# Altium PCB pcb_v3.PcbDoc
Units mil, origin at the board's own origin, x right, y up, seen from the top; angles counter-clockwise.
Board outline 5340 x 3220 mil, 2 copper layers (Top Layer, Bottom Layer); 27 components, 41 nets, 205 pads, 0 vias.
Unrouted connection lines stored in the file: 1.
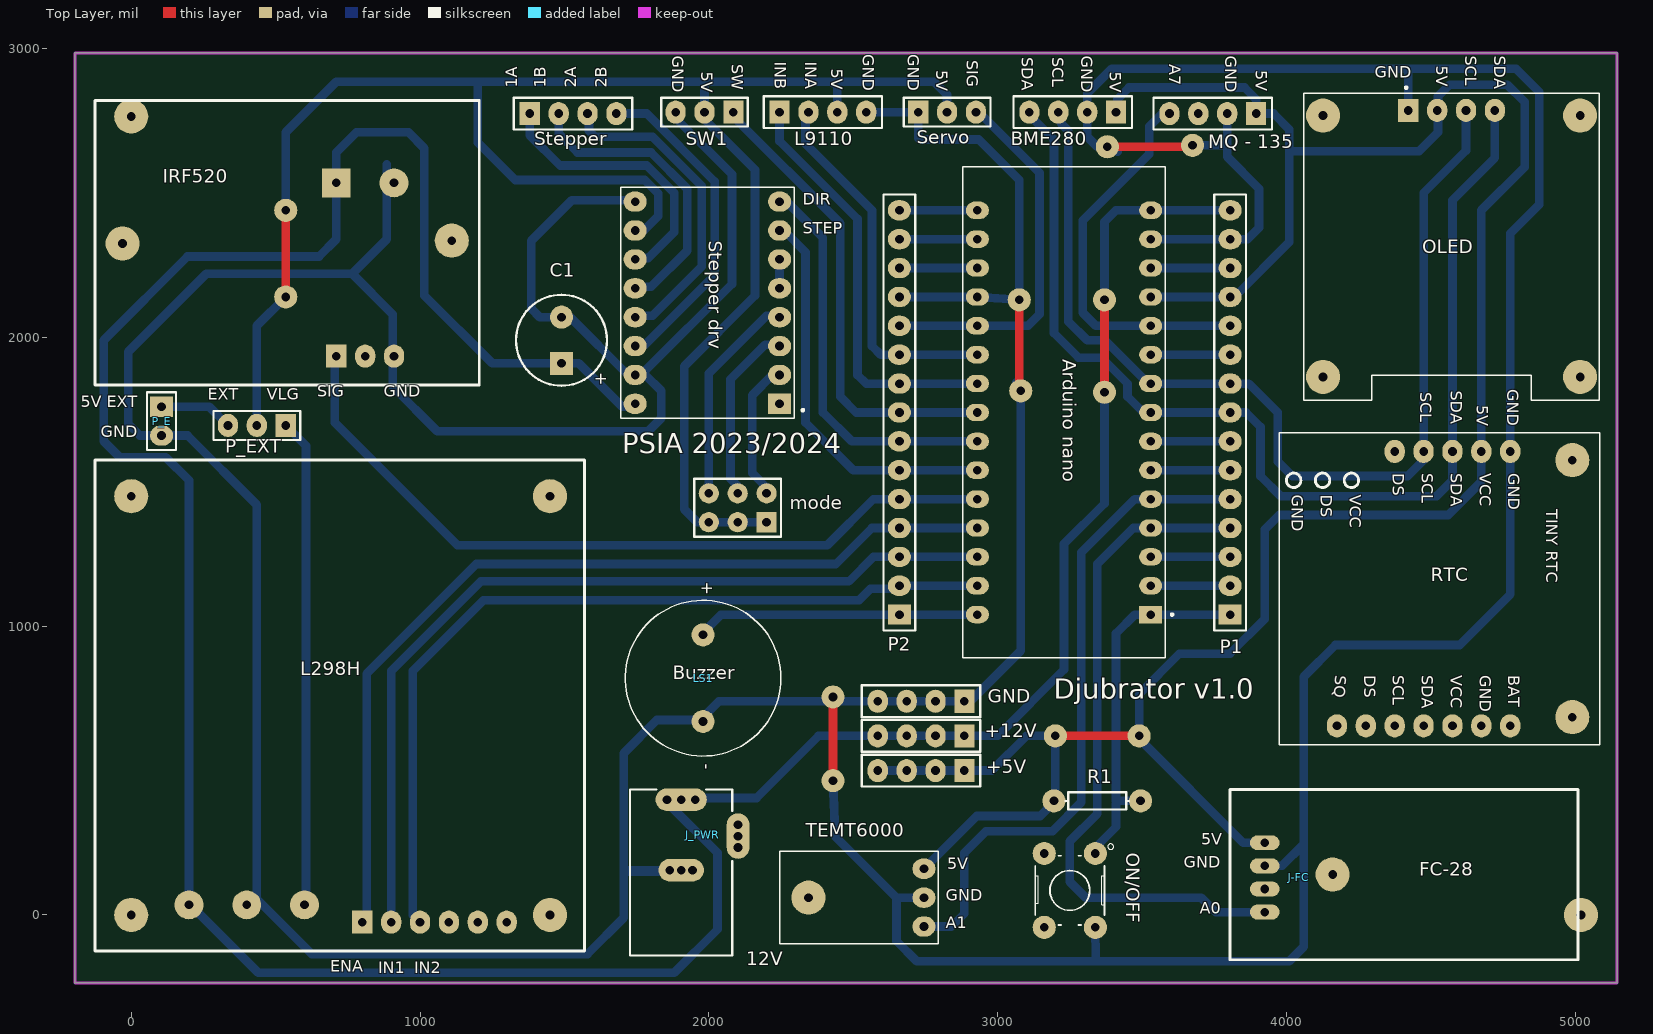
[diagram p0: Top Layer view]
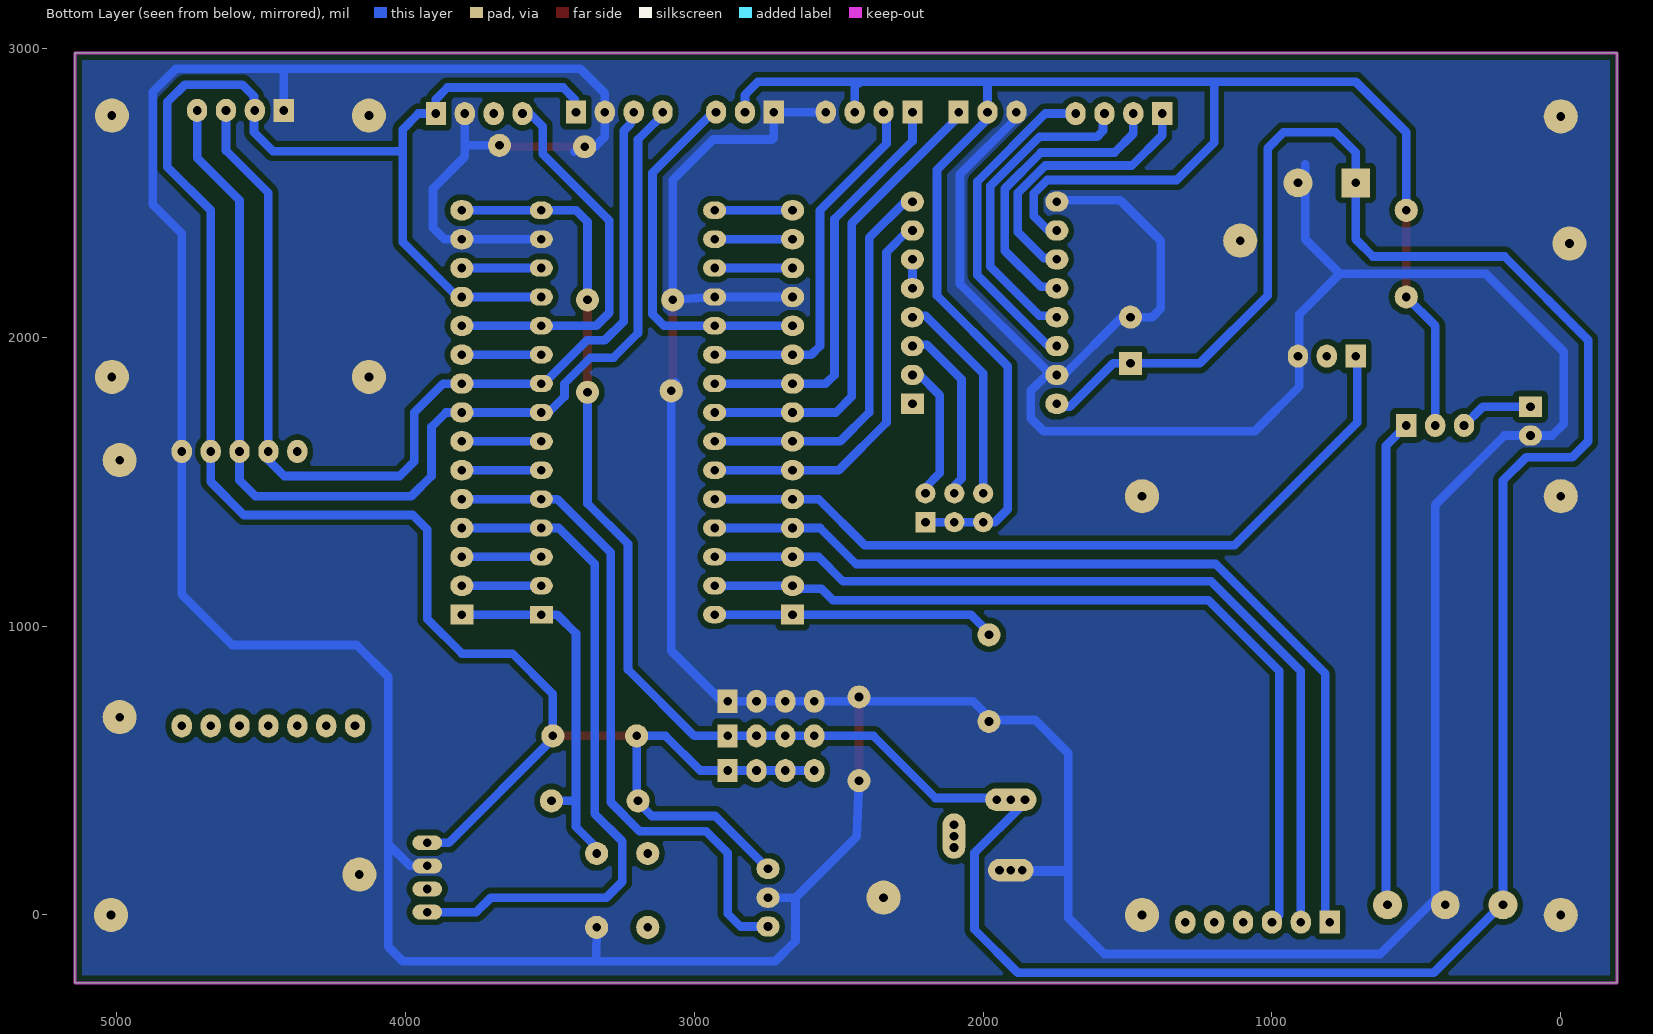
[diagram p1: Bottom Layer view, seen from below]

## Layer stack, top to bottom
Top Solder: solder mask 0.4, Solder Resist, Dk 3.5
Top Layer: signal copper 1.4
Dielectric 1: dielectric 12.6, FR-4, Dk 4.8
Bottom Layer: signal copper 1.4
Bottom Solder: solder mask 0.4, Solder Resist, Dk 3.5

## Board outline
-195,-235 -195,2985 5145,2985 5145,-235

## Design rules (kind name [scope] priority, off if disabled: settings)
Clearance [All] p1: gap=10 ignorepadtopadclearanceinfootprint=FALSE except(0: Arc-Hole Track-Hole SMDPad-Hole THPad-Hole Via-Hole Fill-Hole Poly-Hole Region-Hole Text-Hole; 20: Arc-Poly Track-Poly SMDPad-Poly THPad-Poly Via-Poly Fill-Poly Poly-Poly)
Height [All] p1: minheight=0 maxheight=2000 prefheight=500
PlaneClearance [All] p1: clearance=60
PlaneConnect [All] p1: planeconnectstyle=Direct reliefexpansion=20 reliefentries=4 reliefconductorwidth=10 reliefairgap=10
PolygonConnect [All] p1: connectstyle=Direct reliefconductorwidth=10 reliefentries=4 polygonreliefangle="90 Angle" airgapwidth=10
RoutingVias [All] p1: holewidth=28 width=50 viastyle="Through Hole" minholewidth=28 minwidth=50 maxholewidth=28 maxwidth=50
SolderMaskExpansion [All] p1: expansion=4
Width [All] p1: maxlimit=30 minlimit=20 preferedwidth=30 minimp=50.000000 maximp=50.000000 favimp=50.000000
27 further rules are at their usual default settings.

## Components (designator, comment, footprint, x,y, rotation, side; value= is the part's Value field where it differs from the comment)
+5V "Header 4" HDR1X4 2885,500 r180 top
+12V "Header 4" HDR1X4 2885,620 r180 top
"Arduino nano" "Arduino nano" "arduino nano" 3230,1735 r90 top
BME280 "BME280" HDR1X4 3410,2780 r180 top
C1 "Cap Pol1" ELCO-160 1490,1990 r270 top value=100uF
GND "Header 4" HDR1X4 2885,740 r180 top
IRF520 "IRF520" irf520 -85,1835 r0 top
J-FC "FC-28" FC-28 3885,240 r270 top
J_PWR "12V" KLD-0202 1904.37,-140.28 r90 top
L298H "L298H" L298N 725,725 r270 top
L9110 "L9110" HDR1X4 2245,2780 r0 top
LS1 "Buzzer" BUZZER 1980,820 r270 top
mode "Header 3X2" HDR2X3 2200,1360 r180 top
"MQ - 135" "MQ - 135" HDR1X4 3895,2775 r180 top
OLED "OLED" OLED 4571.93,2333.07 r0 top
ON/OFF "SW-PB" SW_B3F-1000 3250,85 r270 top
P1 "Header 15" HDR1X15 3805,1040 r90 top
P2 "Header 15" HDR1X15 2660,1040 r90 top
P_E "Header 2" HDR1x2 105,1760 r270 top
P_EXT "Header 3" HDR1x3 535,1695 r180 top
R1 "Res1" AXIAL-0.3 3345,395 r180 top value=10K
RTC "DS1307 RTC" RTC 4480,1125 r270 top
Servo "Servo" HDR1x3 2725,2780 r0 top
Stepper "Header 4" HDR1X4 1380,2775 r0 top
"Stepper drv" "A4988" A4988 1995,2120 r180 top
SW1 "Header 3" HDR1x3 2085,2780 r180 top
TEMT6000 "TEMT6000" temt6000 2745,-40 r90 top

## Footprints (in the part's own frame and the unit in brackets; to place one, negate y for a bottom-side part, rotate by r counter-clockwise, add the part's x,y. Pads: shape width x height; smd on the part's side, far side on the other; paste and mask are expansions set on the pad)
A4988 [mil]
  rect 80x70 hole 30: 1(-250,350)
  oval 80x70 hole 30: 2(-250,250) 3(-250,150) 4(-250,50) 5(-250,-50) 6(-250,-150) 7(-250,-250) 8(-250,-350) 9(250,-350) 10(250,-250) 11(250,-150) 12(250,-50) 13(250,50) 14(250,150) 15(250,250) 16(250,350)
  silkscreen extent -335,-400 300,400, body extent -294,-400 294,400, height 224
"arduino nano" [mil]
  rect 60x80 / inner oval 60x80 / far side rect 60x80 hole 30: 1(-695,-300)
  oval 60x80 hole 30: 2(-595,-300) 3(-495,-300) 4(-395,-300) 5(-295,-300) 6(-195,-300) 7(-95,-300) 8(5,-300) 9(105,-300) 10(205,-300) 11(305,-300) 12(405,-300) 13(505,-300) 14(605,-300) 15(705,-300) 16(705,300) 17(605,300) 18(505,300) 19(405,300) 20(305,300) 21(205,300) 22(105,300) 23(5,300) 24(-95,300) 25(-195,300) 26(-295,300) 27(-395,300) 28(-495,300) 29(-595,300) 30(-695,300)
  silkscreen extent -845,-378 855,350, body extent -880,-355 865,345, height 236
AXIAL-0.3 [mil] "Axial Device, Thru-Hole; 2 Leads; 0.3 in Pin Spacing"
  round 80 hole 30: 1(-150,0) 2(150,0)
  silkscreen extent -109,-30 109,30, body extent -165,-49 165,45, height 122
BUZZER [mil]
  round 80 hole 30: N(150,0) P(-150,0)
  silkscreen extent -270,-270 270,270, body extent -276,-271 276,281, height 276
ELCO-160 [mil] "Polarized Capacitor (Radial); 2 Leads"
  rect 80x80 hole 30: 1(80,0)
  round 80 hole 30: 2(-80,0)
  silkscreen extent -157,-157 157,157, body extent -157,-157 157,157, height 477
FC-28 [mil]
  round 118.11 hole 30: 0(100,275)
  oval 51.5x102.99 hole 30: 1(-10,40) 2(70,40) 3(150,40) 4(230,40)
  silkscreen extent -195,-80 395,1125, body extent -176,-250 375,1364, height 197
HDR1x2 [mil]
  rect 70x80 hole 30: 1(0,0)
  oval 70x80 hole 30: 2(100,0)
  silkscreen extent -50,-50 150,50, body extent -50,-50 150,50, height 340
HDR1x3 [mil]
  rect 70x80 hole 30: 1(0,0)
  oval 70x80 hole 30: 2(100,0) 3(200,0)
  silkscreen extent -50,-50 250,50, body extent -50,-50 250,50, height 340
HDR1X4 [mil]
  rect 70x80 hole 30: 1(0,0)
  oval 70x80 hole 30: 2(100,0) 3(200,0) 4(300,0)
  silkscreen extent -55,-55 355,55, body extent -50,-50 350,50, height 340
HDR1X15 [mil]
  rect 70x80 hole 30: 1(0,0)
  oval 70x80 hole 30: 2(100,0) 3(200,0) 4(300,0) 5(400,0) 6(500,0) 7(600,0) 8(700,0) 9(800,0) 10(900,0) 11(1000,0) 12(1100,0) 13(1200,0) 14(1300,0) 15(1400,0)
  silkscreen extent -55,-55 1455,55, body extent -50,-50 1450,50, height 340
HDR2X3 [mil] "Connector; Header; 4x2 Position"
  rect 70x70 hole 30: 1(0,0)
  round 70 hole 30: 2(0,-100) 3(100,0) 4(100,-100) 5(200,0) 6(200,-100)
  silkscreen extent -50,-150 250,50, body extent -50,-150 250,50, height 230
irf520 [mil]
  round 118.11 hole 30: 0(55,490) 0(1195,500)
  rect 70x80 hole 30: 1(795,100)
  oval 70x80 hole 30: 2(895,100) 3(995,100)
  rect 100x100 hole 30: 4(795,700)
  round 100 hole 30: 5(995,700)
  silkscreen extent -40,0 1290,985, body extent -45,-230 1294,990, height 815
KLD-0202 [mm] "DC Power Jack, 2.5mm, KLD Series, PCB Mount"
  oval 2x4.5 hole 0.762: 1(13.7,0)
  round 1.5 hole 0.762: 1A(13.7,-1.25) 1B(13.7,1.25) 2A(7.5,-1) 2B(7.5,1) 3A(9.5,-5) 3B(11.5,-5)
  oval 2x4 hole 0.762: 2(7.5,0)
  oval 4x2 hole 0.762: 3(10.5,-5)
  silkscreen extent 0,-4.5 14.6,4.5, body extent 0,-4.95 14.66,4.75, height 11.09
L298N [mil]
  round 118.11 hole 30: 0(-725,725) 0(-725,-725) 0(725,725) 0(725,-725)
  rect 80x70 hole 30: 1(750,75)
  oval 80x70 hole 30: 2(750,175) 3(750,275) 4(750,375) 5(750,475) 6(750,575)
  round 100 hole 30: 7(690,-125) 8(690,-325) 9(690,-525)
  silkscreen extent -850,-850 850,845, body extent -847,-846 846,846, height 1052
OLED [mil]
  round 118.11 hole 30: 0(-445,-470) 0(-445,435) 0(445,-470) 0(445,435)
  rect 70x80 / inner oval 70x80 / far side rect 70x80 hole 30: 1(-150,452.76)
  oval 70x80 hole 30: 2(-50,452.76) 3(50,452.76) 4(150,452.76)
  silkscreen extent -512,-550 512,535, body extent -512,-512 512,512, height 223
RTC [mil]
  round 118.11 hole 30: 0(-450,510) 0(440,510)
  oval 80x70 hole 30 paste+0 mask+2: 1(470,295) 2(470,195) 3(470,95) 4(470,-5) 5(470,-105) 6(470,-205) 7(470,-305) 8(-480,295) 9(-480,195) 10(-480,95) 11(-480,-5) 12(-480,-105)
  silkscreen extent -545,-505 535,605, body extent -546,-515 536,607, height 417
SW_B3F-1000 [mil]
  round 80 hole 30: 1(-127.95,88.58) 2(127.95,88.58) 3(-127.95,-88.58) 4(127.95,-88.58)
  silkscreen extent -161,-120 120,152, body extent -152,-120 152,116, height 169
temt6000 [mil]
  round 118.11 hole 30: 0(100,400)
  oval 70x80 hole 30: 1(200,0) 2(100,0) 3(0,0)
  silkscreen extent -60,-50 260,500, body extent -57,-50 257,501, height 103

## Part data
+5V +12V GND Stepper: "Header, 4-Pin", LatestRevisionDate=17-Jul-2002, LatestRevisionNote="Re-released for DXP Platform.", Publisher="Altium Limited"
"Arduino nano": "Arduino nano 5V", Package=None, Availability="Not in stock", Check_prices=https://www.snapeda.com/parts/Arduino%20Nano%20Every/Arduino/view-part/?ref=eda, MF=Arduino, MP="Arduino Nano Every", Price=None, SnapEDA_Link=https://www.snapeda.com/parts/Arduino%20Nano%20Every/Arduino/view-part/?ref=snap
C1: "Polarized Capacitor (Radial)", LatestRevisionDate=17-Jul-2002, LatestRevisionNote="Re-released for DXP Platform.", PackageDescription="Polarized Capacitor (Radial); 2 Leads", PackageReference=RB7.6-15, Published=8-Jun-2000, Publisher="Altium Limited"
J-FC: "Датчик Владности почвы FC-28", Package=None, Availability=Unavailable, MP=FC-28, Price=None
J_PWR: library part PWR2.5, "Low Voltage Power Supply Connector", ComponentLink1Description="Manufacturer Link", ComponentLink1URL=http://domino.kycon.com/internet/Products.html, DatasheetDocument=09-May-2002, Published=17-Dec-2003, Publisher="Altium Limited"
LS1: "Magnetic Transducer Buzzer", ComponentLink1Description="Manufacturer Link", ComponentLink1URL=http://www.megastar.com/linecard/buzzmode/index.php, DatasheetVersion=17-Dec-2003, LatestRevisionDate=17-Dec-2003, LatestRevisionNote="Schematic revised, PCB Footprint replaced.", PackageDescription="Magnetic Transducer Buzzer", PackageReference=ABSM-1574, Published=24-Mar-1999, Publisher="Altium Limited"
mode: "Header, 3-Pin, Dual row", LatestRevisionDate=17-Jul-2002, LatestRevisionNote="Re-released for DXP Platform.", Publisher="Altium Limited"
OLED: "0.96” 128 X 64 MONOCHROME GRAPHIC OLED DISPLAY MODULE - I2C", Package=Package, Check_prices=https://www.snapeda.com/parts/DM-OLED096-636/Display+Module/view-part/?ref=eda, MF="Display Module", MP=DM-OLED096-636, SnapEDA_Link=https://www.snapeda.com/parts/DM-OLED096-636/Display+Module/view-part/?ref=snap
ON/OFF: "Switch", LatestRevisionDate=17-Jul-2002, LatestRevisionNote="Re-released for DXP Platform.", PackageDescription="Switch; 2 Leads", PackageReference=SPST-2, Published=24-Mar-1999, Publisher="Altium Limited"
P1 P2: "Header, 30-Pin", LatestRevisionDate=17-Jul-2002, LatestRevisionNote="Re-released for DXP Platform.", Publisher="Altium Limited"
P_E: "Header, 2-Pin", LatestRevisionDate=17-Jul-2002, LatestRevisionNote="Re-released for DXP Platform.", Publisher="Altium Limited"
P_EXT SW1: "Header, 3-Pin", LatestRevisionDate=17-Jul-2002, LatestRevisionNote="Re-released for DXP Platform.", Publisher="Altium Limited"
R1: "Resistor", LatestRevisionDate=17-Jul-2002, LatestRevisionNote="Re-released for DXP Platform.", PackageDescription="Axial Device, Thru-Hole; 2 Leads; 0.3 in Pin Spacing", PackageReference=AXIAL-0.3, Published=8-Jun-2000, Publisher="Altium Limited"
"Stepper drv": "Stepper motor controler; IC: A4988; 1A; Uin mot: 8÷35V", Package=None, Availability=Unavailable, MP=A4988_STEPPER_MOTOR_DRIVER_CARRIER, Price=None

## Free pads (board coordinates)
  round 80 hole 30: 2(535,2140) 2(535,2440) 2(2430,465) 2(2430,755) 2(3075,2130) 2(3080,1815) 2(3200,620) 2(3370,1810) 2(3370,2130) 2(3380,2660) 2(3490,620) 2(3675,2665)
  round 118.11 hole 30: 3(0,2765) 3(5020,0)

## Nets (pads, with @x,y where several pads share a name; then routed paths per layer and width w, separated by ;. In a path a pad name is that pad's centre, name@x,y a point inside that pad or via, vN(x,y) a via of type N, cw(c..) or ccw(c..) an arc to the next point about the centre after c; other vN are vias at no path point)
3V3: "Arduino nano.2" P1.2 | length 275
  Bottom Layer w30: 3530,1140 P1.2
5V: "Arduino nano.12" "MQ - 135.1" +5V.1 +5V.2 +5V.3 +5V.4 BME280.1 J-FC.1 OLED.2 P1.12 pad.2@3200,620 pad.2@3490,620 R1.2 RTC.9 TEMT6000.1 | length 8216.6
  Top Layer w30: pad.2@3200,620 pad.2@3490,620
  Bottom Layer w30: +5V.4 +5V.3 +5V.2 +5V.1 2980,500 3100,620 3200,620 3200,395 3147.5,342.5 2927.5,342.5 TEMT6000.1 ; BME280.1@3415,2805 3415,2825 3455,2865 3855,2865 3895,2825 3895,2790 3910,2775 3955,2775 4010,2720 4010,2645 ; 3530,2140 P1.12 3820,2140 4010,2330 4010,2645 ; J-FC.1 3850,250 3490,610 3490,620 3490,765 3630,905 3805,905 3925,1025 3925,1335 3975,1385 4560,1385 4675,1500 RTC.9 4675,2440 4825,2590 4825,2815 4765,2875 4565,2875 4525,2835 OLED.2@4525,2792.36 ; OLED.2@4528.46,2792.36 OLED.2@4525,2788.9 ; 4010,2645 4460,2645 4525,2710 OLED.2@4525,2788.9 ; OLED.2@4525,2788.9 OLED.2@4525,2792.36 ; OLED.2@4525,2788.9 OLED.2 4515.39,2792.36 OLED.2@4525,2792.36
"5V ext": "Stepper drv.10" L9110.3 mode.1 mode.3 mode.5 P_EXT.2 pad.2@535,2140 pad.2@535,2440 Servo.2 SW1.2 | length 6676.5
  Top Layer w30: pad.2@535,2140 pad.2@535,2440
  Bottom Layer w30: P_EXT.2 435,2040 pad.2@535,2140 ; pad.2@535,2440 535,2710 710,2885 1200,2885 ; 1745,2370 1775,2370 1825,2420 1825,2498.43 1778.43,2545 1330,2545 1200,2675 1200,2885 ; mode.1@2210,1360 mode.1 mode.3 mode.5 1960,1360 1915,1405 1915,1900 2160,2145 2160,2580 1985,2755 SW1.2 1985,2880 1980,2885 ; 2430,2880 2445,2875 ; 2435,2880 2445,2875 ; L9110.3 2445,2875 ; Servo.2 2825,2840 2780,2885 1980,2885 ; 1200,2885 1980,2885
12V: "Arduino nano.15" "Stepper drv.16" +12V.1 +12V.2 +12V.3 +12V.4 C1.1 IRF520.4 J_PWR.1 J_PWR.1A J_PWR.1B L298H.9 P1.15 pad.2@3370,1810 pad.2@3370,2130 | length 11289.6
  Top Layer w30: pad.2@3370,1810 pad.2@3370,2130
  Bottom Layer w30: 1745,1770 1735,1760 1700,1760 1550,1910 C1.1 1250,1910 1015,2145 1015,2655 960,2710 780,2710 710,2640 IRF520.4 710,2340 650,2280 195,2280 -95,1990 -95,1640 -40,1585 120,1585 200,1505 L298H.9 202.5,37.5 440,-200 1880,-200 2030,-50 2030,215 1865,380 1884.09,399.09 J_PWR.1 J_PWR.1A 1959.49,405 2165,405 2380,620 +12V.4 +12V.3 +12V.2 +12V.1 3000,620 3230,850 3230,1285 3370,1425 pad.2@3370,1810 ; pad.2@3380,2135 3370,2145 3370,2400 3410,2440 3530,2440 P1.15
A0: "Arduino nano.4" J-FC.4 P1.4 | length 2369.6
  Bottom Layer w30: P1.4 3530,1340 3470,1340 3345,1215 3345,350 3250,255 3250,115 3305,60 3705,60 3755,10 J-FC.4
A1: "Arduino nano.5" P1.5 TEMT6000.3 | length 2302.8
  Bottom Layer w30: TEMT6000.3 2840,-40 2885,5 2885,215 2960,290 3190,290 3290,390 3290,1255 3475,1440 3530,1440 P1.5
A2: "Arduino nano.6" P1.6 | length 275
  Bottom Layer w30: 3530,1540 P1.6
A3: "Arduino nano.7" P1.7 | length 275
  Bottom Layer w30: 3530,1640 P1.7
A4/SDA: "Arduino nano.8" BME280.4 OLED.4 P1.8 RTC.10 | length 3910.7
  Bottom Layer w30: BME280.4@3090,2790 3195,2685 3195,2015 3280,1930 3360,1930 3450,1840 3450,1795 3505,1740 3530,1740 ; 3542.22,1740 P1.8 3860,1740 3910,1690 3910,1520 3980,1450 4520,1450 4575,1505 RTC.10 4575,2475 4721.93,2621.93 OLED.4
A5/SCL: "Arduino nano.9" BME280.3 OLED.3 P1.9 RTC.11 | length 3611.4
  Bottom Layer w30: BME280.3@3195,2790 3220,2765 3220,2740 3245,2715 3245,2055 3310,1990 3371.57,1990 3521.57,1840 3530,1840 P1.9 ; P1.9@3805,1830 P1.9 ; OLED.3 4621.93,2646.93 4475,2500 RTC.11 4475,1575 4420,1520 4020,1520 3970,1570 3970,1740 3870,1840 P1.9
A6: "Arduino nano.10" P1.10 | length 275
  Bottom Layer w30: 3530,1940 P1.10
A7: "Arduino nano.11" "MQ - 135.4" P1.11 | length 1372.5
  Bottom Layer w30: 3595,2790 3595,2775 3570,2775 3525,2730 3525,2635 3295,2405 3295,2085 3340,2040 3530,2040 P1.11
AREF: "Arduino nano.3" P1.3 | length 275
  Bottom Layer w30: 3530,1240 P1.3
D2: "Arduino nano.20" P2.11 Servo.3 | length 1298.6
  Bottom Layer w30: P2.11 2930,2040 3105,2040 3145,2080 3145,2570 2935,2780 Servo.3
D3: "Arduino nano.21" L9110.2 P2.10 | length 1282.7
  Bottom Layer w30: L9110.2@2335,2780 2335,2670 2565,2440 2565,1970 2595,1940 P2.10 2930,1940
D4: "Arduino nano.22" L9110.1 P2.9 | length 1453.4
  Bottom Layer w30: L9110.1@2235,2780 2245,2770 2245,2680 2515,2410 2515,1870 2545,1840 P2.9 2930,1840
D5: "Arduino nano.23" P2.8 SW1.1 | length 1636
  Bottom Layer w30: SW1.1 2085,2765 2455,2395 2455,1795 2510,1740 P2.8 2930,1740
D6: "Arduino nano.24" "Stepper drv.8" P2.7 | length 1383.2
  Bottom Layer w30: 2245,2470 2270,2470 2395,2345 2395,1740 2495,1640 P2.7 2930,1640
D7: "Arduino nano.25" "Stepper drv.7" P2.6 | length 1374.4
  Bottom Layer w30: 2245,2370 2260,2370 2335,2295 2335,1705 2500,1540 P2.6 2930,1540
D8: "Arduino nano.26" IRF520.1 P2.5 | length 2702.3
  Bottom Layer w30: IRF520.1@705,1940 705,1705 1130,1280 2410,1280 2570,1440 P2.5 2930,1440
D9: "Arduino nano.27" L298H.1 P2.4 | length 3190.4
  Bottom Layer w30: L298H.1 815,-10 815,835 1195,1215 2440,1215 2565,1340 P2.4 2930,1340
D10: "Arduino nano.28" L298H.2 P2.3 | length 3063.6
  Bottom Layer w30: L298H.2 900,845 1210,1155 2485,1155 2570,1240 P2.3 2930,1240
D11: "Arduino nano.29" L298H.3 P2.2 | length 2938.4
  Bottom Layer w30: L298H.3 975,0 975,845 1220,1090 2520,1090 2560,1130 P2.2@2645,1130 ; P2.2 2930,1140
D12: "Arduino nano.30" LS1.P P2.1 | length 992.5
  Bottom Layer w30: LS1.P@1968.24,965.87 2042.37,1040 P2.1 2930,1040
D13: "Arduino nano.1" ON/OFF.1 P1.1 R1.1 | length 1275.2
  Bottom Layer w30: ON/OFF.1 3338.58,233.58 3410,305 3410,385 3415,390 ; 3410,395 3475,395 R1.1@3481.78,388.22 ; 3410,405 3410,975 3475,1040 3530,1040 P1.1
ext: P_E.1 P_EXT.3 | length 256.9
  Bottom Layer w30: P_E.1 270,1760 P_EXT.3
GND: "Arduino nano.14" "Arduino nano.19" "MQ - 135.2" "Stepper drv.9" "Stepper drv.15" BME280.2 C1.2 GND.1 GND.2 GND.3 GND.4 IRF520.0 IRF520.3 IRF520.5 J-FC.0 J-FC.2 J_PWR.2 J_PWR.2A J_PWR.2B L298H.0 L298H.8 L9110.4 LS1.N OLED.0 OLED.1 ON/OFF.2 P1.14 P2.12 P_E.2 pad.2@2430,465 pad.2@2430,755 pad.2@3075,2130 pad.2@3080,1815 pad.2@3380,2660 pad.2@3675,2665 pad.3 RTC.0 RTC.8 Servo.1 SW1.3 TEMT6000.0 TEMT6000.2 | length 23718.7
  Top Layer w30: pad.2@2430,465 pad.2@2430,755 ; pad.2@3075,2130 3075,1850 pad.2@3080,1815 ; pad.2@3380,2660 3670,2660 pad.2@3675,2665
  Bottom Layer w30: 885,2600 885,2340 765,2220 ; 1740,1865 1745,1870 ; 1770,2475 1525,2475 1385,2335 1385,2100 1415,2070 C1.2 1520,2070 1720,1870 1745,1870 ; SW1.3 1885,2760 2080,2565 2080,2185 1780,1885 1780,1870 ; J_PWR.2 J_PWR.2B 1705,155 1705,560 1820,675 1970,675 2035,740 GND.4 GND.3 GND.2 GND.1 2905,740 3080,915 3080,1815 3080,1830 pad.2@3065,1845 ; J_PWR.2@1920,150 1705,150 1705,-10 1580,-135 625,-135 435,55 435,1420 195,1660 P_E.2 30,1660 -10,1700 -10,1950 260,2220 765,2220 ; pad.2@2430,465 2437.89,272.11 2650,60 ; L9110.4@2535,2780 L9110.4 Servo.1 2725,2690 2730,2685 2935,2685 3075,2545 3075,2130 2930,2140 P2.12 ; TEMT6000.2@2755,70 TEMT6000.2 2650,60 ; ON/OFF.2 3340,-150 ; pad.2@3415.16,2642.49 3380,2660 3345,2660 3310,2695 BME280.2 3310,2845 3395,2930 4421.93,2930 4421.93,2921.93 ; 3530,2340 P1.14 3865,2340 3905,2380 3905,2515 3795,2625 3795,2665 ; pad.2@3675,2665 3795,2665 ; 3795,2775 3795,2665 ; J-FC.2 3985,170 4060,245 ; OLED.1 4421.93,2921.93 ; 765,2220 905,2080 905,1830 1060,1675 1790,1675 1835,1720 1835,1815 1780,1870 ; 1745,1870 1780,1870 ; 2650,60 2650,-90 2720,-160 4010,-160 4060,-110 4060,245 ; 4060,245 4060,825 4170,935 4600,935 4775,1110 RTC.8 4775,2360 4875,2460 4875,2850 4795,2930 4430,2930 4421.93,2921.93
NetJ_PWR_3: J_PWR.3 J_PWR.3A J_PWR.3B
Netmode_2: "Stepper drv.2" mode.2 | length 484.7
  Bottom Layer w30: mode.2 2200,1480 2150,1530 2150,1800 2220,1870 2245,1870
Netmode_4: "Stepper drv.3" mode.4 | length 650.1
  Bottom Layer w30: mode.4 2100,1485 2075,1510 2075,1855 2195,1975 2270,1975
Netmode_6: "Stepper drv.4" mode.6 | length 767.8
  Bottom Layer w30: mode.6 2000,1875 2200,2075 2270,2075
"NetStepper drv_5": "Stepper drv.5" "Stepper drv.6" | length 100
  Bottom Layer w30: 2245,2170 2245,2270
NetStepper_1: "Stepper drv.11" Stepper.1 | length 940.1
  Bottom Layer w30: Stepper.1 1380,2700 1485,2595 1785,2595 1880,2500 1880,2365 1790,2275 1770,2275
NetStepper_2: "Stepper drv.12" Stepper.2 | length 1015.5
  Bottom Layer w30: Stepper.2 1480,2705 1545,2640 1800,2640 1925,2515 1925,2300 1800,2175 1770,2175
NetStepper_3: "Stepper drv.13" Stepper.3 | length 1084.1
  Bottom Layer w30: Stepper.3@1585,2775 1585,2715 1605,2695 1805,2695 1975,2525 1975,2245 1805,2075 1770,2075
NetStepper_4: "Stepper drv.14" Stepper.4 | length 1111.8
  Bottom Layer w30: Stepper.4 1785,2775 2020,2540 2020,2215 1780,1975 1770,1975
RST_L: "Arduino nano.13" P1.13 | length 275
  Bottom Layer w30: 3530,2240 P1.13
RST_R: "Arduino nano.18" P2.13 | length 270
  Bottom Layer w30: P2.13 2930,2240
RXD: "Arduino nano.17" P2.14 | length 270
  Bottom Layer w30: P2.14 2930,2340
TXD: "Arduino nano.16" P2.15 | length 270
  Bottom Layer w30: P2.15 2930,2440
VLG: L298H.7 P_EXT.1 | length 1659
  Bottom Layer w30: P_EXT.1 605,1625 L298H.7@605,65
pads on no net: "MQ - 135.3" "Stepper drv.1" IRF520.2 J-FC.3 L298H.4 L298H.5 L298H.6 ON/OFF.3 ON/OFF.4 RTC.1 RTC.2 RTC.3 RTC.4 RTC.5 RTC.6 RTC.7 RTC.12

## Polygon pours and split planes (outlines as drawn)
GND on Bottom Layer "ground" (solid, remove dead copper, pour order 0): -195,2985 5140,2984.92 5145,-235 -195,-230

## Keep-outs
Keep-Out Layer:
  the board outline again, w10

## Silkscreen, mask and mechanical layers (free items; w line width, h text height)
Top Overlay:
  text "GND" at 2520,2980 h70 r270
  text "GND" at 2675,2980 h70 r270
  text "GND" at 1860,2975 h70 r270
  text "GND" at 3275,2975 h70 r270
  text "GND" at 3775,2975 h70 r270
  text "SCL" at 4605,2975 h70 r270
  text "SDA" at 4705,2975 h70 r270
  text "SDA" at 3070,2970 h70 r270
  text "SCL" at 3175,2970 h70 r270
  text "SIG" at 2880,2960 h70 r270
  text "INB" at 2215,2955 h70 r270
  text "INA" at 2320,2955 h70 r270
  text "SW" at 2065,2945 h70 r270
  text "A7" at 3580,2945 h70 r270
  text "5V" at 4505,2940 h70 r270
  text "5V" at 2410,2930 h70 r270
  text "5V" at 3880,2925 h70 r270
  text "5V" at 2774.14,2924.1 h70 r270
  text "5V" at 1960,2920 h70 r270
  text "5V" at 3375,2920 h70 r270
  text "GND" at 4305,2885 h70
  text "1A" at 1350,2865 h70 r90
  text "1B" at 1450,2865 h70 r90
  text "2A" at 1555,2865 h70 r90
  text "2B" at 1660,2865 h70 r90
  text "DIR" at 2325,2445 h70
  text "STEP" at 2325,2345 h70
  text "GND" at 4750,1820 h70 r270
  text "SDA" at 4555,1815 h70 r270
  text "SCL" at 4450,1810 h70 r270
  text "SIG" at 645,1780 h70
  text "GND" at 875,1780 h70
  text "EXT" at 265,1770 h70
  text "VLG" at 470,1770 h70
  text "5V" at 4645,1765 h70 r270
  text "5V EXT" at -175,1745 h70
  text "GND" at -105,1640 h70
  text "PSIA 2023/2024" at 1700,1575 h120
  text "Djubrator v1.0" at 3195,725 h120
  text "5V" at 3705,230 h70
  text "GND" at 3645,150 h70
  text "5V" at 2825,145 h70
  text "GND" at 2820,35 h70
  text "A0" at 3700,-10 h70
  text "A1" at 2820,-60 h70
  text "ENA" at 690,-210 h70
  text "IN1" at 855,-215 h70
  text "IN2" at 980,-215 h70

## Dimensions
-195,-235 to -195,2985 on Top Overlay
-195,2985 to 5145,2985 on Top Overlay

## Text inside footprints (layer, text, board x,y; h text height)
C1: Top Overlay "+" at 1595,1880 h70 r270
LS1: Top Overlay "+" at 1961.43,1154.31 h70 r270; Top Overlay "-" at 1961.43,523.46 h70 r270
RTC: Top Overlay "TINY RTC" at 4885,1405 h70 r270; Top Overlay "BAT" at 4755,830 h70 r270; Top Overlay "GND" at 4655,830 h70 r270; Top Overlay "VCC" at 4555,830 h70 r270; Top Overlay "SDA" at 4455,830 h70 r270; Top Overlay "SCL" at 4355,830 h70 r270; Top Overlay "DS" at 4255,830 h70 r270; Top Overlay "SQ" at 4155.05,831.4 h70 r266; Top Overlay "DS" at 4105,1455 h70 r270; Top Overlay "GND" at 4005,1455 h70 r270; Top Overlay "VCC" at 4205,1455 h70 r270; Top Overlay "DS" at 4355,1530 h70 r270; Top Overlay "GND" at 4755,1530 h70 r270; Top Overlay "VCC" at 4655,1530 h70 r270; Top Overlay "SDA" at 4555,1530 h70 r270; Top Overlay "SCL" at 4455,1530 h70 r270